# EAGLE board LCD-OLINUXINO-7TS (EAGLE 7.1.0)
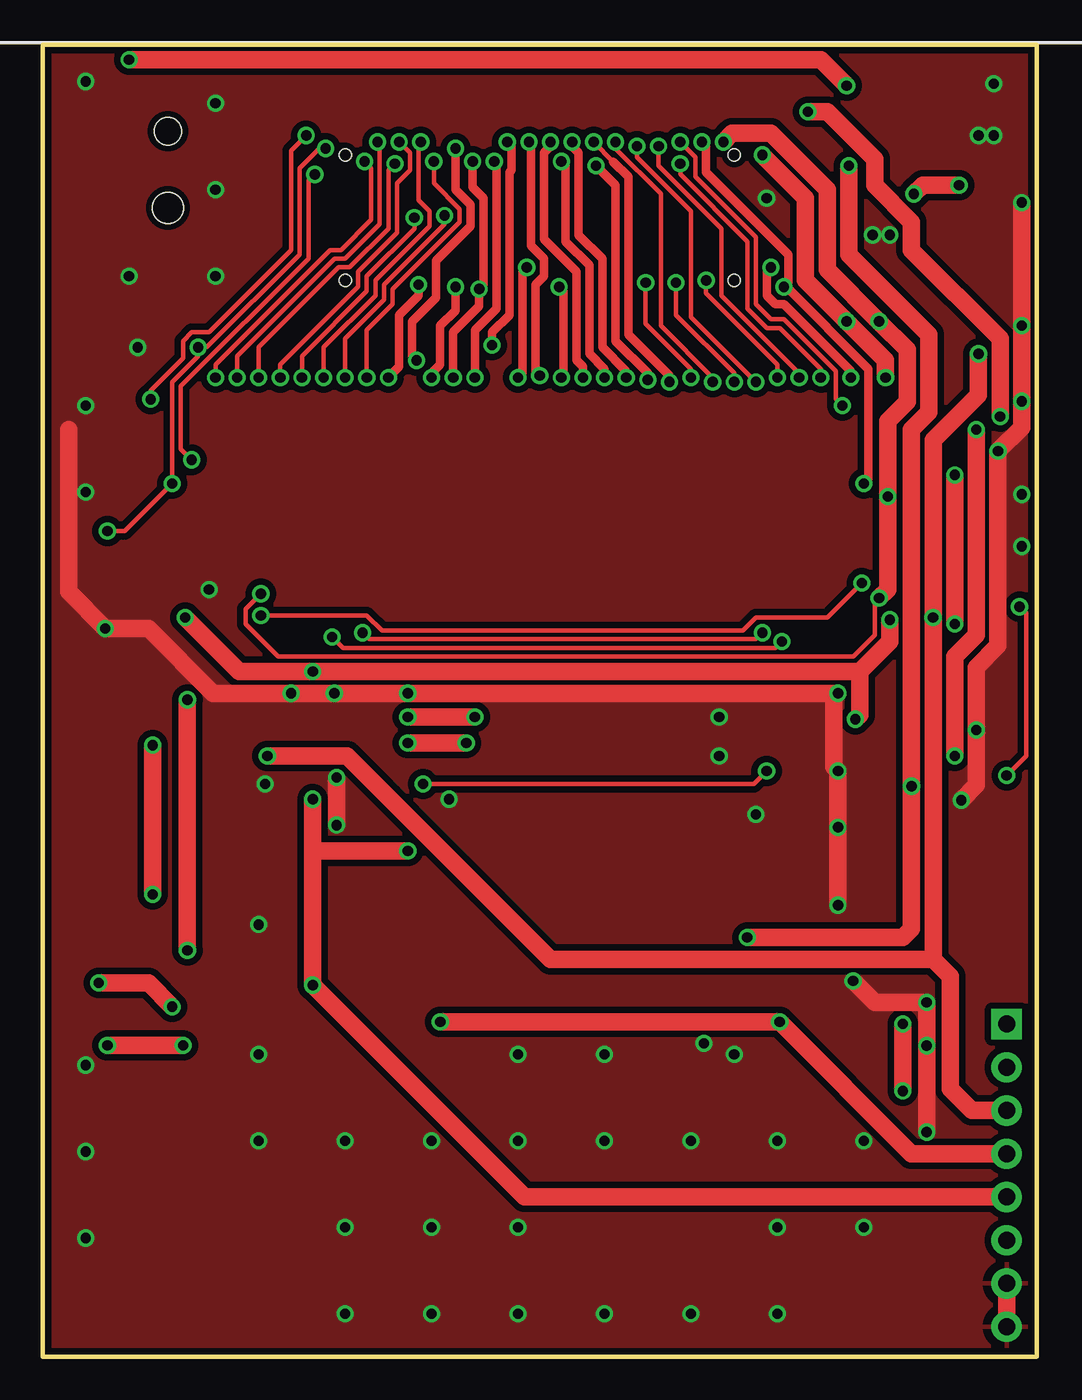
[diagram p0: board, top side]
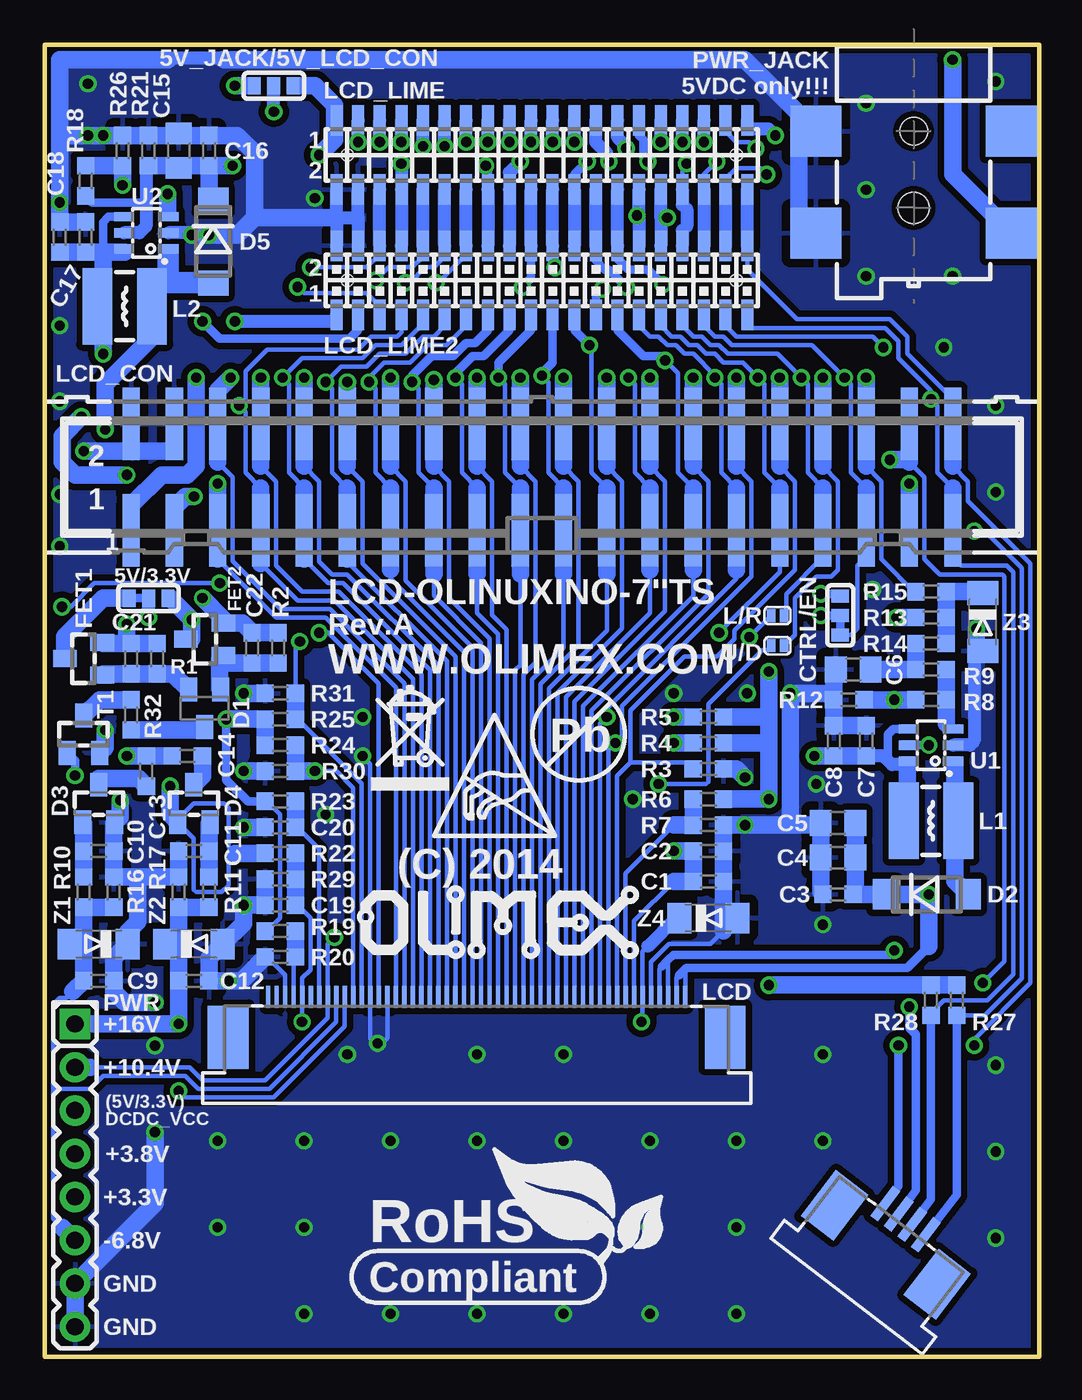
[diagram p1: board, bottom side, seen from below]

Size 58.42 x 77.09 mm. Coordinates in mm from the lower left corner, seen from the top.
Outline: 0,0 58.42,0 58.42,77.09 0,77.09 0,0
Copper layers (1+16): Top 0.035mm / dielectric 1.5mm / Bottom 0.035mm
Design rules "default": minimum track width 9.5mil, minimum drill 0.5mm, track to track 9.5mil, track to pad 9.5mil, pad to pad 9.5mil, via to via 9.5mil, smd to smd 1mil, copper to edge 10mil, drill to drill 8mil, minimum pad ring 8mil, minimum via ring 8mil, stop-mask expansion 4mil, vias tented up to drill 25mil, thermal gap 20mil
Net classes: 1 pwr: width 0.254 mm, drill 0.254 mm, clearance 0.241 mm

## Footprints (pad centres in the part's own frame; a part is rotated, then mirrored left to right if it is on the bottom)
SJ_2_SMALL = smd 0.762 x 1.016: 1 -1.143,0; 2 0,0; 3 1.143,0
C0603_DWS = smd 1.016 x 1.016: 1 -0.889,0; 2 0.889,0
C0805_5MIL_DWS = smd 1.27 x 1.524: 1 -1.016,0; 2 1.016,0
SJ_2_SMALL_23_TIED = smd 0.762 x 1.016: 1 -1.143,0; 2 0,0; 3 1.143,0
SOT23C = smd 1.4 x 1: 1 1.1,-0.95; 2 1.1,0.95; 3 -1.1,0
MLL-41 = smd 1.45 x 1.8: A 2.445,0; K -2.445,0
SOT23C(BAT54S) = smd 1.4 x 1: 1 1.1,-0.95; 2 1.1,0.95; 3 -1.1,0
SOT23 = smd 1.4 x 1: 1 1.1,-0.95; 2 1.1,0.95; 3 -1.1,0
CD42(43) = smd 1.75 x 4.5: 1 -1.6,0; 2 1.6,0
SJ_1_SMALLER = smd 0.508 x 0.762: 1 -0.381,0; 2 0.381,0
LCD7"_TOUCH(AT070TN90) = smd 0.25 x 1.3 bottom: 1 69.05,40.45; 2 69.55,40.45; 3 70.05,40.45; 4 70.55,40.45; 5 71.05,40.45; 6 71.55,40.45; 7 72.05,40.45; 8 72.55,40.45; 9 73.05,40.45; 10 73.55,40.45; 11 74.05,40.45; 12 74.55,40.45; 13 75.05,40.45; 14 75.55,40.45; 15 76.05,40.45; 16 76.55,40.45; 17 77.05,40.45; 18 77.55,40.45; 19 78.05,40.45; 20 78.55,40.45; 21 79.05,40.45; 22 79.55,40.45; 23 80.05,40.45; 24 80.55,40.45; 25 81.05,40.45; 26 81.55,40.45; 27 82.05,40.45; 28 82.55,40.45; 29 83.05,40.45; 30 83.55,40.45; 31 84.05,40.45; 32 84.55,40.45; 33 85.05,40.45; 34 85.55,40.45; 35 86.05,40.45; 36 86.55,40.45; 37 87.05,40.45; 38 87.55,40.45; 39 88.05,40.45; 40 88.55,40.45; 41 89.05,40.45; 42 89.55,40.45; 43 90.05,40.45; 44 90.55,40.45; 45 91.05,40.45; 46 91.55,40.45; 47 92.05,40.45; 48 92.55,40.45; 49 93.05,40.45; 50 93.55,40.45 | smd 0.55 x 2.2 rotated 217.5 bottom: 51 54.913,26.473; 52 55.707,27.082; 53 56.5,27.691; 54 57.294,28.299 | smd 2.4 x 3.7 bottom: P1 95.9,38.075; P2 66.7,38.075 | smd 2.4 x 3.4 rotated 217.5 bottom: P3 60.275,28.192; P4 54.245,23.566
ML40-MALE(GBH-254-SMT-40) = smd 1 x 4.25: 1 -24.13,-3.125; 2 -24.13,3.125; 3 -21.59,-3.125; 4 -21.59,3.125; 5 -19.05,-3.125; 6 -19.05,3.125; 7 -16.51,-3.125; 8 -16.51,3.125; 9 -13.97,-3.125; 10 -13.97,3.125; 11 -11.43,-3.125; 12 -11.43,3.125; 13 -8.89,-3.125; 14 -8.89,3.125; 15 -6.35,-3.125; 16 -6.35,3.125; 17 -3.81,-3.125; 18 -3.81,3.125; 19 -1.27,-3.125; 20 -1.27,3.125; 21 1.27,-3.125; 22 1.27,3.125; 23 3.81,-3.125; 24 3.81,3.125; 25 6.35,-3.125; 26 6.35,3.125; 27 8.89,-3.125; 28 8.89,3.125; 29 11.43,-3.125; 30 11.43,3.125; 31 13.97,-3.125; 32 13.97,3.125; 33 16.51,-3.125; 34 16.51,3.125; 35 19.05,-3.125; 36 19.05,3.125; 37 21.59,-3.125; 38 21.59,3.125; 39 24.13,-3.125; 40 24.13,3.125
YA-V36P-2X20-LF = smd 0.7 x 1.8: 1 -12.065,2.032; 2 -12.065,-2.032; 3 -10.795,2.032; 4 -10.795,-2.032; 5 -9.525,2.032; 6 -9.525,-2.032; 7 -8.255,2.032; 8 -8.255,-2.032; 9 -6.985,2.032; 10 -6.985,-2.032; 11 -5.715,2.032; 12 -5.715,-2.032; 13 -4.445,2.032; 14 -4.445,-2.032; 15 -3.175,2.032; 16 -3.175,-2.032; 17 -1.905,2.032; 18 -1.905,-2.032; 19 -0.635,2.032; 20 -0.635,-2.032; 21 0.635,2.032; 22 0.635,-2.032; 23 1.905,2.032; 24 1.905,-2.032; 25 3.175,2.032; 26 3.175,-2.032; 27 4.445,2.032; 28 4.445,-2.032; 29 5.715,2.032; 30 5.715,-2.032; 31 6.985,2.032; 32 6.985,-2.032; 33 8.255,2.032; 34 8.255,-2.032; 35 9.525,2.032; 36 9.525,-2.032; 37 10.795,2.032; 38 10.795,-2.032; 39 12.065,2.032; 40 12.065,-2.032 | hole 0.7: -11.43,0; 11.43,0
GPH127SMT-02X20(PA-V16X-2X20-LF) = smd 0.7 x 1.8: 1 -12.065,-2.032; 2 -12.065,2.032; 3 -10.795,-2.032; 4 -10.795,2.032; 5 -9.525,-2.032; 6 -9.525,2.032; 7 -8.255,-2.032; 8 -8.255,2.032; 9 -6.985,-2.032; 10 -6.985,2.032; 11 -5.715,-2.032; 12 -5.715,2.032; 13 -4.445,-2.032; 14 -4.445,2.032; 15 -3.175,-2.032; 16 -3.175,2.032; 17 -1.905,-2.032; 18 -1.905,2.032; 19 -0.635,-2.032; 20 -0.635,2.032; 21 0.635,-2.032; 22 0.635,2.032; 23 1.905,-2.032; 24 1.905,2.032; 25 3.175,-2.032; 26 3.175,2.032; 27 4.445,-2.032; 28 4.445,2.032; 29 5.715,-2.032; 30 5.715,2.032; 31 6.985,-2.032; 32 6.985,2.032; 33 8.255,-2.032; 34 8.255,2.032; 35 9.525,-2.032; 36 9.525,2.032; 37 10.795,-2.032; 38 10.795,2.032; 39 12.065,-2.032; 40 12.065,2.032 | hole 0.7: -11.43,0; 11.43,0
HN1X8 = drill 1 pad 1.778 square: 1 -8.89,0 | drill 1 pad 1.778: 2 -6.35,0; 3 -3.81,0; 4 -1.27,0; 5 1.27,0; 6 3.81,0; 7 6.35,0; 8 8.89,0
PWR-JACK-SMD = smd 3 x 3: 1 6,5.75; 2 0,-5.75; 3 6,-5.75; 4 0,5.75 | hole 1.6: 0,0 | hole 1.8: 4.5,0
R0603_5MIL_DWS = smd 1.016 x 1.016: 1 -0.889,0; 2 0.889,0
SOT-23 = smd 1.4 x 1: 1 1.1,-0.95; 2 1.1,0.95; 3 -1.1,0
SOT23-6 = smd 1.2 x 0.55: 1 1.3,-0.95; 2 1.3,0; 3 1.3,0.95; 4 -1.3,0.95; 5 -1.3,0; 6 -1.3,-0.95
MINI-MELF = smd 1.4 x 1.8: 1 -1.7,0; 2 1.7,0

## Placement (x,y rotation side)
5V/3.3V  5V:Close/3.3V:Open  [SJ_2_SMALL]  52.32,44.58 0 bottom
5V_JACK/5V_LCD_CON  5V_JACK:Open/5V_LCD_CON:Close  [SJ_2_SMALL]  44.96,74.68 0 bottom
C1  22uF/6.3V  [C0603_DWS]  19.43,27.94 0 bottom
C2  100nF  [C0603_DWS]  19.43,29.72 0 bottom
C3  100nF  [C0603_DWS]  11.81,27.18 180 bottom
C4  1uF/25V  [C0805_5MIL_DWS]  11.81,29.34 180 bottom
C5  1uF/25V  [C0805_5MIL_DWS]  11.81,31.37 180 bottom
C6  10uF/16V  [C0805_5MIL_DWS]  10.92,40.39 180 bottom
C7  22uF/6.3V  [C0603_DWS]  10.16,36.2 270 bottom
C8  22uF/6.3V  [C0603_DWS]  12.06,36.2 270 bottom
C9  100nF  [C0603_DWS]  55.24,22.1 0 bottom
C10  100nF  [C0603_DWS]  55.24,29.72 0 bottom
C11  100nF  [C0603_DWS]  49.66,29.72 180 bottom
C12  100nF  [C0603_DWS]  49.66,22.1 0 bottom
C13  100nF  [C0603_DWS]  52.45,34.42 90 bottom
C14  100nF  [C0603_DWS]  50.04,35.31 0 bottom
C15  10uF/16V  [C0805_5MIL_DWS]  50.55,70.87 90 bottom
C16  100nF  [C0603_DWS]  48.77,70.87 90 bottom
C17  22uF/6.3V  [C0603_DWS]  56.01,65.79 270 bottom
C18  22uF/6.3V  [C0603_DWS]  57.53,65.79 270 bottom
C19  100nF  [C0603_DWS]  44.58,26.54 180 bottom
C20  100nF  [C0603_DWS]  44.58,31.11 180 bottom
C21  22uF/6.3V  [C0603_DWS]  53.34,41.02 270 bottom
C22  100nF  [C0603_DWS]  46.23,41.66 270 bottom
CTRL/EN  CTRL:Close/EN:Open  [SJ_2_SMALL_23_TIED]  11.68,43.56 270 bottom
D1  BAT54C  [SOT23C]  49.02,38.1 90 bottom
D2  1N5819/SS14  [MLL-41]  6.6,27.18 0 bottom
D3  BAT54S  [SOT23C(BAT54S)]  55.24,32.51 270 bottom
D4  BAT54S  [SOT23C(BAT54S)]  49.66,32.51 270 bottom
D5  1N5819/SS14  [MLL-41]  48.51,65.53 270 bottom
FET1  IRLML6402  [SOT23]  56.13,41.02 0 bottom
FET2  IRLML6402  [SOT23]  49.02,42.16 0 bottom
L1  4.7uH/1.15A/DCR<0.1R/CD43  [CD42(43)]  6.35,31.5 0 bottom
L2  4.7uH/1.15A/DCR<0.1R/CD43  [CD42(43)]  53.72,61.72 0 bottom
L/R  Open  [SJ_1_SMALLER]  15.37,43.56 0 bottom
LCD  AT070TN90+(FPV-WZA21-50-LF)+(FPA-WZB25-04-LF)  [LCD7"_TOUCH(AT070TN90)]  -48.26,-19.29 0 top
LCD_CON  ML40-GBH-254-SMT-40  [ML40-MALE(GBH-254-SMT-40)]  29.21,51.69 0 bottom
LCD_LIME  GPH127SMT-02x20  [YA-V36P-2X20-LF]  29.21,70.61 0 bottom
LCD_LIME2  GPH127SMT-02x20  [GPH127SMT-02X20(PA-V16X-2X20-LF)]  29.21,63.25 0 bottom
PWR  NA(HN1X8)  [HN1X8]  56.64,10.67 270 bottom
PWR_JACK  DCJ-W54R-20-LF  [PWR-JACK-SMD]  7.37,72.01 270 bottom
R1  20k  [R0603_5MIL_DWS]  51.82,41.02 90 bottom
R2  20k  [R0603_5MIL_DWS]  44.7,41.66 90 bottom
R3  NA  [R0603_5MIL_DWS]  19.43,34.54 180 bottom
R4  NA  [R0603_5MIL_DWS]  19.43,36.07 180 bottom
R5  NA  [R0603_5MIL_DWS]  19.43,37.59 180 bottom
R6  NA  [R0603_5MIL_DWS]  19.43,32.77 180 bottom
R7  10k  [R0603_5MIL_DWS]  19.43,31.24 180 bottom
R8  2.2k  [R0603_5MIL_DWS]  6.35,38.61 180 bottom
R9  20k  [R0603_5MIL_DWS]  6.35,40.39 180 bottom
R10  1k/1%  [R0603_5MIL_DWS]  56.13,27.3 90 bottom
R11  1k/1%  [R0603_5MIL_DWS]  48.77,27.3 90 bottom
R12  2.2R  [R0603_5MIL_DWS]  11.18,38.61 180 bottom
R13  4.7k  [R0603_5MIL_DWS]  6.35,43.43 180 bottom
R14  4.7k  [R0603_5MIL_DWS]  6.35,41.91 180 bottom
R15  220R  [R0603_5MIL_DWS]  6.35,44.96 0 bottom
R16  51k/1%  [R0603_5MIL_DWS]  54.36,27.3 270 bottom
R17  51k/1%  [R0603_5MIL_DWS]  50.55,27.3 270 bottom
R18  51k/1%  [R0603_5MIL_DWS]  56.01,69.09 270 bottom
R19  10k  [R0603_5MIL_DWS]  44.58,25.02 0 bottom
R20  NA  [R0603_5MIL_DWS]  44.58,23.5 0 bottom
R21  20k  [R0603_5MIL_DWS]  52.32,70.87 270 bottom
R22  1k/1%  [R0603_5MIL_DWS]  44.58,29.59 0 bottom
R23  10k  [R0603_5MIL_DWS]  44.58,32.64 0 bottom
R24  NA  [R0603_5MIL_DWS]  44.58,35.94 0 bottom
R25  10k  [R0603_5MIL_DWS]  44.58,37.47 0 bottom
R26  1k/1%  [R0603_5MIL_DWS]  53.85,70.87 90 bottom
R27  NA  [R0603_5MIL_DWS]  4.83,20.95 270 bottom
R28  NA  [R0603_5MIL_DWS]  6.35,20.95 270 bottom
R29  560R/1%  [R0603_5MIL_DWS]  44.58,28.07 180 bottom
R30  10k  [R0603_5MIL_DWS]  44.58,34.42 180 bottom
R31  NA  [R0603_5MIL_DWS]  44.58,38.99 180 bottom
R32  1k/1%  [R0603_5MIL_DWS]  53.34,37.72 270 bottom
T1  DTC114YKA  [SOT-23]  56.13,36.58 270 bottom
U1  AP3031KTR-G1  [SOT23-6]  6.35,35.94 0 bottom
U2  AP3031KTR-G1  [SOT23-6]  52.45,66.04 0 bottom
U$8  [OLIMEX1_V]  22.35,23.26 0 bottom
U$9  [PB]  27.05,36.58 0 bottom
U$10  [ESD_SYMBOL]  35.56,30.61 0 bottom
U$11  [RECYCLE_BIN1/8]  39.24,33.27 0 bottom
U$12  [ROHS]  39.37,3.81 0 bottom
U/D  Open  [SJ_1_SMALLER]  15.37,41.78 0 bottom
Z1  BZV55C6V8  [MINI-MELF]  55.24,24.26 180 bottom
Z2  BZV55C16  [MINI-MELF]  49.66,24.26 0 bottom
Z3  NA(BZV55C3V0)  [MINI-MELF]  3.3,43.18 270 bottom
Z4  NA(BZV55C3V9)  [MINI-MELF]  19.43,25.78 0 bottom

## Library data of the parts
5V/3.3V 5V_JACK/5V_LCD_CON CTRL/EN L/R U/D = jumper
C1-C22 R1-R32 = rcl
D1 D3 D4 = semicon-smd-ipc
D2 D5 PWR_JACK Z1-Z4 = gogo
FET1 FET2 PWR = Penko
L1 L2 T1 = OLIMEX_DISCRET
LCD = olimex_lcd
LCD_CON LCD_LIME LCD_LIME2 = con-harting-ml
U1 U2 = OLIMEX_IC
U$8-U$12 = olimex_logo1

## Nets
+5V: 5V/3.3V.2 C7.2 C8.2 C17.2 C18.2 L1.1 L2.1 PWR.3 U1.4 U1.6 U2.4 U2.6
+12V: C15.1 C16.1 D4.1 D5.K LCD.43 PWR.2 R18.2 R21.2 R22.1 U2.5
+15V: C12.1 LCD.41 PWR.1 R11.1 R17.2 Z2.1
-24V: C9.1 LCD.42 PWR.6 R10.1 R16.2 Z1.2
GND [pwr]: C1.2 C2.2 C3.2 C4.2 C5.2 C6.2 C7.1 C8.1 C9.2 C10.2 C11.2 C12.2 C15.2 C16.2 C17.1 C18.1 C19.2 C20.2 D3.2 LCD.5 LCD.36 LCD.38 LCD.48 LCD_CON.2 LCD_CON.4 LCD_LIME2.2 LCD_LIME2.4 LCD_LIME.2 LCD_LIME.4 PWR.7 PWR.8 PWR_JACK.2 PWR_JACK.3 R3.1 R7.1 R12.2 R16.1 R17.1 R20.1 R21.1 R26.2 R29.2 R30.2 R31.2 T1.2 U1.2 U2.2 Z1.1 Z2.2 Z3.2 Z4.2
LCD_B0: LCD.19 LCD_CON.21 LCD_LIME2.21 LCD_LIME.21
LCD_B1: LCD.18 LCD_CON.22 LCD_LIME2.22 LCD_LIME.22
LCD_B2: LCD.17 LCD_CON.23 LCD_LIME2.23 LCD_LIME.23
LCD_B3: LCD.16 LCD_CON.24 LCD_LIME2.24 LCD_LIME.24
LCD_B4: LCD.15 LCD_CON.25 LCD_LIME2.25 LCD_LIME.25
LCD_B5: LCD.14 LCD_CON.26 LCD_LIME2.26 LCD_LIME.26
LCD_B6: LCD.13 LCD_CON.27 LCD_LIME2.27 LCD_LIME.27
LCD_B7: LCD.12 LCD_CON.28 LCD_LIME2.28 LCD_LIME.28
LCD_BKL: LCD_CON.36 LCD_LIME2.36 LCD_LIME.36 R15.1
LCD_CLK: LCD.37 LCD_CON.31 LCD_LIME2.31 LCD_LIME.31
LCD_DE: LCD.9 LCD_CON.32 LCD_LIME2.32 LCD_LIME.32 R3.2
LCD_G0: LCD.27 LCD_CON.13 LCD_LIME2.13 LCD_LIME.13
LCD_G1: LCD.26 LCD_CON.14 LCD_LIME2.14 LCD_LIME.14
LCD_G2: LCD.25 LCD_CON.15 LCD_LIME2.15 LCD_LIME.15
LCD_G3: LCD.24 LCD_CON.16 LCD_LIME2.16 LCD_LIME.16
LCD_G4: LCD.23 LCD_CON.17 LCD_LIME2.17 LCD_LIME.17
LCD_G5: LCD.22 LCD_CON.18 LCD_LIME2.18 LCD_LIME.18
LCD_G6: LCD.21 LCD_CON.19 LCD_LIME2.19 LCD_LIME.19
LCD_G7: LCD.20 LCD_CON.20 LCD_LIME2.20 LCD_LIME.20
LCD_HSYNC: LCD.11 LCD_CON.29 LCD_LIME2.29 LCD_LIME.29 R5.2
LCD_L/R: L/R.1 LCD.39 R25.2 R31.1
LCD_PWRE: CTRL/EN.3 LCD_CON.35 LCD_LIME2.35 LCD_LIME.35
LCD_R0: LCD.35 LCD_CON.5 LCD_LIME2.5 LCD_LIME.5
LCD_R1: LCD.34 LCD_CON.6 LCD_LIME2.6 LCD_LIME.6
LCD_R2: LCD.33 LCD_CON.7 LCD_LIME2.7 LCD_LIME.7
LCD_R3: LCD.32 LCD_CON.8 LCD_LIME2.8 LCD_LIME.8
LCD_R4: LCD.31 LCD_CON.9 LCD_LIME2.9 LCD_LIME.9
LCD_R5: LCD.30 LCD_CON.10 LCD_LIME2.10 LCD_LIME.10
LCD_R6: LCD.29 LCD_CON.11 LCD_LIME2.11 LCD_LIME.11
LCD_R7: LCD.28 LCD_CON.12 LCD_LIME2.12 LCD_LIME.12
LCD_U/D: LCD.40 R24.2 R30.1 U/D.1
LCD_VSYNC: LCD.10 LCD_CON.30 LCD_LIME2.30 LCD_LIME.30 R4.2
N$1: LCD.8 R6.2 R7.2
N$2: C14.2 D4.3
N$3 [pwr]: C22.1 CTRL/EN.1 FET2.2 LCD_CON.3 LCD_LIME2.3 LCD_LIME.3 R2.2
N$4: C11.1 D4.2 R11.2
N$5: R8.1 R9.1 U1.3
N$6: C10.1 D3.1 R10.2
N$7: 5V_JACK/5V_LCD_CON.2 C21.1 FET1.2 R1.2
N$8: C22.2 D1.1 FET2.1 R2.1
N$9: C21.2 D1.2 FET1.1 R1.1
N$10: C13.1 D3.3
N$11: R32.1 T1.3
N$12: C6.1 R9.2 R14.2
N$13: D2.A L1.2 U1.1
N$14: R13.1 R14.1 R15.2 Z3.1
N$15: L/R.2 LCD_CON.33 LCD_LIME2.33 LCD_LIME.33
N$16: CTRL/EN.2 T1.1
N$17: LCD_CON.34 LCD_LIME2.34 LCD_LIME.34 U/D.2
N$18: 5V/3.3V.1 FET1.3
N$19: D1.3 R32.2
N$22: 5V_JACK/5V_LCD_CON.1 PWR_JACK.1
N$23: 5V_JACK/5V_LCD_CON.3 LCD_CON.1 LCD_LIME2.1 LCD_LIME.1
N$42: LCD.47 R19.2 R20.2
N$123: C13.2 C14.1 D5.A L2.2 U2.1
N$126: R18.1 R26.1 U2.3
RESET: C20.1 LCD.44 R23.2
TPX1: LCD.51 LCD_CON.37 LCD_LIME2.37 LCD_LIME.37 R27.2
TPX2: LCD.53 LCD_CON.38 LCD_LIME2.38 LCD_LIME.38
TPY1: LCD.52 LCD_CON.39 LCD_LIME2.39 LCD_LIME.39 R28.2
TPY2: LCD.54 LCD_CON.40 LCD_LIME2.40 LCD_LIME.40
VCC [pwr]: 5V/3.3V.3 C1.1 C2.1 FET2.3 LCD.7 PWR.5 R4.1 R5.1 R6.1 R13.2 R19.1 R23.1 R24.1 R25.1 R27.1 R28.1
VCOM: C19.1 LCD.6 LCD.46 PWR.4 R22.2 R29.1 Z4.1
VLED+: C3.1 C4.1 C5.1 D2.K LCD.1 LCD.2 U1.5
VLED-: LCD.3 LCD.4 R8.2 R12.1

## Tracks (layer width: path | path; a pad name or v marks a point on that pad's centre or on a via)
+5V  (via drill 0.6)
  Top 1.016: v13.21,35.31 17.91,35.31 29.84,23.37 52.32,23.37 | 52.32,23.37 53.34,22.35 53.34,15.75 54.61,14.48 PWR.3 | 52.32,23.37 v52.32,43.43 52.32,53.85 54.99,56.52 v54.99,58.93
  Bottom 0.508: 53.72,64.9 53.72,65.09 U2.6 | U2.4 54.68,66.99 54.99,66.67 54.99,64.9 | U1.4 8.57,36.89 8.89,36.58 8.89,35.43 9.02,35.31 | 5V/3.3V.2 53.34,44.58 | 7.75,34.8 7.75,34.99 U1.6
  Bottom 0.762: C7.2 9.02,35.31 9.02,35.18 8.64,34.8 7.75,34.8 7.75,34.67 | v52.32,43.43 5V/3.3V.2
  Bottom 1.016: C18.2 C17.2 54.99,64.9 | 54.99,64.9 53.72,64.9 | L1.1 7.75,31.5 7.75,34.67 | C7.2 C8.2 v13.21,35.31 | 54.99,61.72 54.99,64.9 | v54.99,58.93 54.99,61.72 | 54.99,61.72 L2.1
+12V  (via drill 0.6)
  Top 1.016: v47.37,69.98 47.37,64.77 52.07,60.07 52.07,55.5 51.05,54.48 v51.05,33.53 51.05,25.15 50.55,24.64 v41.4,24.64
  Bottom 0.254: 55.75,17.02 49.91,17.02 49.15,16.26 45.47,16.26 41.79,19.93 LCD.43 41.79,24.25 v41.4,24.64 | 47.62,27.7 47.62,29.21 47.24,29.59 47.62,29.97 47.62,32.26 47.88,32.51 49.66,32.51 50.61,31.56 D4.1 49.66,30.46 49.66,27.43 49.53,27.31 48.01,27.31 47.62,27.7
  Bottom 0.508: 52.47,67.82 55.63,67.82 R18.2
  Bottom 0.762: U2.5 52.85,66.04 52.47,66.42 52.47,67.82 52.47,69.98 R21.2
  Bottom 1.016: 50.55,69.98 R21.2 | 50.55,69.98 C15.1 | C16.1 50.55,69.98 | C16.1 48.77,68.23 D5.K | D4.1 51.05,31.86 v51.05,33.53 | 47.24,29.59 R22.1 | 55.75,17.02 PWR.2 | v47.37,69.98 C16.1
+15V  (via drill 0.6)
  Top 1.016: v50.55,15.62 v50.55,19.56
  Bottom 0.254: v50.55,15.62 50.16,15.24 44.96,15.24 40.79,19.41 LCD.41
  Bottom 1.016: R11.1 R17.2 50.55,24.26 | 50.55,24.26 C12.1 v50.55,19.56 PWR.1 | 50.55,24.26 Z2.1
-24V
  Bottom 0.254: 56.77,21.46 57.15,21.08 57.53,21.08 57.91,20.7 57.91,15.75 | 57.4,7.62 57.91,8.13 57.91,15.75 | 57.91,15.75 55.75,15.75 54.99,16.51 50.16,16.51 49.4,15.75 45.21,15.75 41.29,19.67 LCD.42
  Bottom 1.016: R16.2 R10.1 56.13,24.26 | 56.13,24.26 Z1.2 | 56.13,24.26 C9.1 56.77,21.46 | 57.4,7.62 PWR.6
GND  (via drill 0.6, 0.6 pad 1.02)
  Top 1.016: v46.74,26.54 v46.74,31.11 v46.74,34.42 46.48,34.67 46.48,38.99 | v53.98,32.7 54.86,33.59 v54.86,36.83 54.86,40.51 56.13,41.78 v56.13,53.21 57.53,54.61 v57.53,67.82 | 46.48,38.99 v21.46,38.99 v17.14,38.99 v14.61,38.99 10.03,38.99 6.22,42.8 v3.68,42.8 1.52,44.96 1.52,54.48 | 46.48,38.99 v46.74,38.99 | v17.27,31.24 v17.27,34.04 | v47.62,22.1 48.9,20.83 v51.94,20.83 v51.94,13.21 | PWR.7 PWR.8
  Bottom 0.254: LCD.48 44.29,22.45 45.34,23.5 R20.1 | v39.75,35.31 39.29,34.84 LCD.38 39.29,18.72 38.99,18.41 v38.86,18.41 38.61,18.41 38.29,18.73 LCD.36 | LCD.5 22.79,23.2 21.73,24.26 19.32,24.26 18.54,25.03
  Bottom 0.762: v49.78,65.91 49.91,66.04 U2.2 | U1.2 4.06,35.94 3.81,36.2 3.81,41.35 3.68,41.48 | 41.27,66.93 LCD_LIME2.2 | 41.27,66.93 LCD_LIME.2 | 40.01,66.93 LCD_LIME2.4 | 40.01,66.93 LCD_LIME.4 | 41.27,66.93 40.01,66.93 | 51.18,76.2 51.05,76.33 48.01,76.33 47.88,76.2
  Bottom 1.016: v49.78,65.91 v48.77,65.91 47.12,65.91 46.1,66.93 | C17.1 C18.1 v57.53,67.82 57.53,71.75 | 50.55,71.75 R21.1 R26.2 v54.99,71.75 57.53,71.75 | 50.55,71.75 C15.2 | 50.55,71.75 C16.2 47.12,71.75 46.1,70.74 46.1,66.93 | C11.2 R17.1 52.96,28.19 | 52.96,28.19 52.96,25.54 53.55,24.96 Z1.1 54.36,23.45 C9.2 54.36,21.46 53.72,20.83 v51.94,20.83 | 52.96,28.19 R16.1 C10.2 54.36,31.35 D3.2 53.98,31.73 v53.98,32.7 | R29.2 C19.2 v46.74,26.54 46.74,25.48 Z2.2 48.77,23.45 C12.2 v47.62,22.1 46.86,22.1 R20.1 | v46.74,31.11 C20.2 | v46.74,34.42 R30.2 | v46.74,38.99 R31.2 | C3.2 12.83,27.3 C4.2 12.83,31.24 | 12.83,31.24 C5.2 | C7.1 C8.1 R12.2 12.06,38.99 | 12.06,38.99 12.06,40.26 C6.2 | 12.06,38.99 v14.61,38.99 14.61,31.24 | 18.54,25.78 C1.2 C2.2 R7.1 v17.27,31.24 14.61,31.24 | 18.54,25.78 18.54,25.03 | v17.27,34.04 17.78,34.54 R3.1 | 12.83,31.24 14.61,31.24 | 18.54,25.78 Z4.2 | 46.1,66.93 41.27,66.93 | LCD_CON.4 50.8,53.21 53.34,53.21 | Z3.2 3.68,41.48 v3.68,42.8 | T1.2 54.86,35.8 v54.86,36.83 | PWR.8 PWR.7 51.94,9.02 v51.94,13.21 | 53.34,53.21 LCD_CON.2 | v56.13,53.21 53.34,53.21 | PWR_JACK.3 14.1,66.01 14.1,72.01 | 47.88,76.2 17.27,76.2 14.1,73.03 14.1,72.01 | 51.18,76.2 57.53,76.2 57.53,71.75 | 14.1,72.01 PWR_JACK.2
  other vias: 23.88,32.77 9.78,45.09 41.91,31.88 42.55,68.07 17.78,2.54 17.78,7.62 17.78,12.7 12.7,12.7 12.7,17.78 22.86,12.7 22.86,7.62 22.86,2.54 27.94,2.54 33.02,2.54 38.1,2.54 43.18,2.54 43.18,7.62 48.26,7.62 43.18,12.7 48.26,12.7 38.1,12.7 33.02,12.7 27.94,12.7 27.94,7.62 27.94,17.78 33.02,17.78 40.64,17.78 2.54,6.99 2.54,12.06 2.54,17.14 12.7,25.4 13.08,33.66 39.75,37.59 57.53,47.62 57.53,50.67 2.54,50.8 2.54,55.88 55.88,74.8 55.88,71.75 57.53,56.13 57.53,60.58 51.94,18.29 5.59,59.31 5.08,63.5 10.16,63.5 10.16,68.58 10.16,73.66 2.54,74.93
  pour Top (isolate 0.381, rank 2): -2.54,77.98 -2.54,-2.54 60.96,-2.54 60.96,77.98
  pour Bottom (isolate 0.381, rank 3): -5.08,-5.08 63.5,-5.08 63.5,80.52 -5.08,80.52
LCD_B0  (via drill 0.6)
  Top 0.508: v28.57,71.37 28.7,71.25 28.7,65.28 29.46,64.52 29.46,63.5 28.96,62.99 28.96,57.91 v29.21,57.66
  Bottom 0.254: LCD.19 29.79,39.81 27.94,41.66 27.94,45.99 | 27.94,51.05 28.83,51.94 28.83,57.28 v29.21,57.66
  Bottom 0.508: LCD_LIME2.21 28.57,58.42 29.21,57.78 v29.21,57.66
  Bottom 0.762: v28.57,71.37 LCD_LIME.21
  Bottom 1.016: 27.94,45.99 LCD_CON.21 27.94,51.05
LCD_B1  (via drill 0.6)
  Top 0.508: v28.45,64.01 28.19,63.75 28.19,57.78 v27.94,57.53
  Bottom 0.254: LCD.18 29.29,39.54 27.05,41.78 27.05,51.44 27.94,52.32
  Bottom 0.508: LCD_LIME2.22 28.57,64.14 v28.45,64.01
  Bottom 0.762: LCD_LIME2.22 LCD_LIME.22
  Bottom 1.016: 27.94,52.32 LCD_CON.22 v27.94,57.53
LCD_B2  (via drill 0.6)
  Top 0.508: v27.3,71.37 27.56,71.12 27.56,69.72 27.43,69.6 27.43,61.21 26.42,60.2 v26.42,59.44
  Bottom 0.254: LCD.17 28.79,39.28 25.4,42.67 25.4,45.99 | 25.4,51.05 26.29,51.94 26.29,59.31 v26.42,59.44
  Bottom 0.508: LCD_LIME2.23 27.3,60.33 v26.42,59.44
  Bottom 0.762: v27.3,71.37 LCD_LIME.23
  Bottom 1.016: 25.4,45.99 LCD_CON.23 25.4,51.05
LCD_B3  (via drill 0.6)
  Top 0.508: v26.54,70.23 26.67,70.1 26.67,61.59 25.4,60.33 v25.4,57.53
  Bottom 0.254: LCD.16 28.29,39.02 24.51,42.8 24.51,51.44 25.4,52.32
  Bottom 0.508: LCD_LIME.24 27.3,69.47 v26.54,70.23
  Bottom 0.762: LCD_LIME.24 LCD_LIME2.24
  Bottom 1.016: 25.4,52.32 LCD_CON.24 v25.4,57.53
LCD_B4  (via drill 0.6)
  Top 0.508: v25.27,70.23 25.27,68.71 25.91,68.07 25.91,62.99 v25.65,62.74 25.65,61.72 24.13,60.2 v24.13,57.53
  Bottom 0.254: LCD.15 27.79,38.76 22.86,43.69 22.86,46.23 | 22.86,51.05 23.75,51.94 23.75,57.15 v24.13,57.53
  Bottom 0.508: LCD_LIME2.25 26.04,62.36 v25.65,62.74
  Bottom 0.762: v25.27,70.23 25.4,70.36 25.4,70.74 26.04,71.37 LCD_LIME.25
  Bottom 1.016: 22.86,46.23 LCD_CON.25 22.86,51.05
LCD_B5  (via drill 0.6)
  Top 0.508: v24.26,62.87 24.26,61.47 23.37,60.58 23.37,58.29 22.86,57.78 v22.86,57.53
  Bottom 0.254: LCD.14 27.29,38.5 21.97,43.81 21.97,51.44 22.86,52.32
  Bottom 0.508: LCD_LIME2.26 26.04,64.39 25.53,63.88 25.27,63.88 v24.26,62.87
  Bottom 0.762: LCD_LIME2.26 LCD_LIME.26
  Bottom 1.016: 22.86,52.32 LCD_CON.26 v22.86,57.53
LCD_B6  (via drill 0.6)
  Top 0.508: v24.26,70.99 24.26,68.58 25.15,67.69 25.15,66.42 23.11,64.39 23.11,62.23 21.72,60.83 21.72,58.8 v21.97,58.55
  Bottom 0.254: LCD.13 26.79,38.23 20.32,44.7 20.32,46.23 | 20.32,51.05 21.21,51.94 21.21,57.78 v21.97,58.55
  Bottom 0.508: LCD_LIME2.27 24.77,60.33 23.24,58.8 22.23,58.8 v21.97,58.55
  Bottom 0.762: v24.26,70.99 24.26,71.12 24.77,71.63 LCD_LIME.27
  Bottom 1.016: 20.32,46.23 LCD_CON.27 20.32,51.05
LCD_B7  (via drill 0.6)
  Top 0.508: v22.1,62.99 22.1,62.36 20.95,61.21 20.95,58.17 v20.32,57.53
  Bottom 0.254: LCD.12 26.29,37.97 19.43,44.83 19.43,51.44 20.32,52.32
  Bottom 0.508: LCD_LIME2.28 24.77,64.52 24.13,63.88 22.99,63.88 v22.1,62.99
  Bottom 0.762: LCD_LIME2.28 LCD_LIME.28
  Bottom 1.016: 20.32,52.32 LCD_CON.28 v20.32,57.53
LCD_BKL  (via drill 0.6)
  Top 0.254: v10.16,57.53 10.16,58.29 16.89,65.02 17.53,65.02 19.3,66.8 19.3,69.85 v18.92,70.23
  Bottom 0.254: R15.1 7.24,44.83 9.27,46.86 9.27,51.44 10.16,52.32 | LCD_LIME.36 19.68,69.47 v18.92,70.23
  Bottom 0.762: LCD_LIME.36 LCD_LIME2.36
  Bottom 1.016: 10.16,52.32 LCD_CON.36 v10.16,57.53
LCD_CLK  (via drill 0.6)
  Top 0.254: v22.23,71.37 22.1,71.25 22.1,67.94 22.73,67.31 22.73,66.42 19.56,63.25 19.56,62.36 16.51,59.31 v16.51,57.53 | v42.29,42.55 41.91,42.16 19.18,42.16 v18.8,42.55
  Bottom 0.254: LCD.37 38.79,39.55 41.78,42.55 v42.29,42.55 | 15.24,51.05 16.13,51.94 16.13,57.15 v16.51,57.53 17.4,58.42 18.54,58.42 19.05,58.93 19.56,58.93 20.07,59.44 20.57,59.44 21.08,59.94 21.59,59.94 22.23,60.58 LCD_LIME2.31 | v18.8,42.55 15.24,46.1 LCD_CON.31
  Bottom 0.762: v22.23,71.37 LCD_LIME.31
  Bottom 1.016: LCD_CON.31 15.24,51.05
LCD_DE  (via drill 0.6)
  Top 0.254: v21.84,66.93 21.84,66.29 19.05,63.5 19.05,62.61 15.24,58.8 v15.24,57.53
  Bottom 0.254: LCD.9 24.79,34.14 24,34.92 | 24,34.92 24,37.97 20.83,41.15 18.92,41.15 17.91,42.16 17.91,42.67 14.35,46.23 14.35,51.44 15.24,52.32 | 24,34.92 20.7,34.92 R3.2
  Bottom 0.762: 22.23,66.93 LCD_LIME2.32 | 22.23,66.93 LCD_LIME.32 | v21.84,66.93 22.23,66.93
  Bottom 1.016: 15.24,52.32 LCD_CON.32 v15.24,57.53
LCD_G0  (via drill 0.6)
  Top 0.254: v33.66,71.37 33.66,70.99 36.32,68.33 36.32,60.58 39.37,57.53 v39.37,57.28
  Bottom 0.254: LCD.27 33.79,41.41 38.1,45.72 38.1,46.24 | LCD_LIME2.13 33.66,60.58 34.8,59.44 35.94,59.44 36.96,58.42 38.48,58.42 39.37,57.53 v39.37,57.28 38.99,56.9 38.99,51.94 38.1,51.05
  Bottom 0.762: v33.66,71.37 LCD_LIME.13
  Bottom 1.016: 38.1,46.24 LCD_CON.13 38.1,51.05
LCD_G1  (via drill 0.6)
  Top 0.254: v35.43,63.12 35.43,60.71 38.1,58.04 v38.1,57.53
  Bottom 0.254: LCD.26 33.29,41.69 37.21,45.61 37.21,51.44 38.1,52.32 | LCD_LIME2.14 33.66,64.77 35.31,63.12 v35.43,63.12
  Bottom 0.762: LCD_LIME2.14 LCD_LIME.14
  Bottom 1.016: 38.1,52.32 LCD_CON.14 v38.1,57.53
LCD_G2  (via drill 0.6)
  Top 0.254: 33.53,70.23 v32.38,71.37
  Top 0.508: 33.53,70.23 34.42,69.34 34.42,60.07 36.83,57.66 v36.83,57.28
  Bottom 0.254: LCD.25 32.79,41.95 35.56,44.72 35.56,45.99 | 35.56,51.05 36.45,51.94 36.45,56.9 v36.83,57.28
  Bottom 0.508: v36.83,57.28 36.83,57.66 35.69,58.8 34.42,58.8 33.66,59.56 33.15,59.56 32.38,60.33 LCD_LIME2.15
  Bottom 0.762: v32.38,71.37 LCD_LIME.15
  Bottom 1.016: 35.56,45.99 LCD_CON.15 35.56,51.05
LCD_G3  (via drill 0.6)
  Top 0.508: v32.51,69.98 33.66,68.83 33.66,59.69 35.56,57.78 v35.56,57.4
  Bottom 0.254: LCD.24 32.29,42.21 34.67,44.59 34.67,51.44 35.56,52.32
  Bottom 0.508: LCD_LIME.16 32.38,69.85 v32.51,69.98
  Bottom 0.762: LCD_LIME.16 LCD_LIME2.16
  Bottom 1.016: 35.56,52.32 LCD_CON.16 v35.56,57.4
LCD_G4  (via drill 0.6)
  Top 0.508: v31.11,71.37 31.11,71.12 31.5,70.74 31.5,65.91 32.89,64.52 32.89,59.31 34.29,57.91 v34.29,57.53
  Bottom 0.254: LCD.23 31.79,42.47 33.02,43.7 33.02,45.99 | 33.02,51.05 33.91,51.94 33.91,57.15 v34.29,57.53
  Bottom 0.508: LCD_LIME2.17 31.11,60.33 32.64,58.8 33.27,58.8 34.29,57.78 v34.29,57.53
  Bottom 0.762: v31.11,71.37 LCD_LIME.17
  Bottom 1.016: 33.02,45.99 LCD_CON.17 33.02,51.05
LCD_G5  (via drill 0.6)
  Top 0.508: v33.02,57.53 33.02,58.04 32.13,58.93 32.13,64.14 30.73,65.53 30.73,69.98 v30.48,70.23
  Bottom 0.254: LCD.22 31.29,42.73 32.13,43.58 32.13,51.44 33.02,52.32
  Bottom 0.762: LCD_LIME2.18 LCD_LIME.18 31.11,69.6 v30.48,70.23
  Bottom 1.016: 33.02,52.32 LCD_CON.18 v33.02,57.53
LCD_G6  (via drill 0.6)
  Top 0.508: v29.84,71.37 29.84,71.12 29.46,70.74 29.46,65.66 31.37,63.75 31.37,58.55 31.75,58.17 v31.75,57.53
  Bottom 0.254: LCD.21 30.79,40.34 30.48,40.66 30.48,45.99 | 30.48,51.05 31.37,51.94 31.37,57.15 v31.75,57.53
  Bottom 0.508: v31.75,57.53 31.75,58.42 29.84,60.33 LCD_LIME2.19
  Bottom 0.762: v29.84,71.37 LCD_LIME.19
  Bottom 1.016: 30.48,45.99 LCD_CON.19 30.48,51.05
LCD_G7  (via drill 0.6)
  Top 0.508: v30.35,62.87 30.61,62.61 30.61,57.66 v30.48,57.53
  Bottom 0.254: LCD.20 30.29,40.08 29.59,40.78 29.59,51.44 30.48,52.32
  Bottom 0.508: LCD_LIME2.20 29.84,63.37 v30.35,62.87
  Bottom 0.762: LCD_LIME2.20 LCD_LIME.20
  Bottom 1.016: 30.48,52.32 LCD_CON.20 v30.48,57.53
LCD_HSYNC  (via drill 0.6)
  Top 0.254: v22.99,70.23 22.99,68.96 24.51,67.44 24.51,66.67 20.57,62.74 20.57,61.85 19.05,60.33 v19.05,57.53
  Top 1.016: v25.4,37.59 v21.46,37.59
  Bottom 0.254: LCD.11 25.79,37.2 v25.4,37.59 25.4,38.1 17.78,45.72 17.78,46.23 | 17.78,51.05 18.67,51.94 18.67,57.15 v19.05,57.53 19.05,57.66 20.32,58.93 20.83,58.93 21.34,59.44 21.84,59.44 22.35,59.94 22.86,59.94 23.5,60.58 LCD_LIME2.29
  Bottom 0.508: v22.99,70.23 23.24,70.48 23.24,71.5 23.5,71.75 LCD_LIME.29
  Bottom 1.016: 17.78,46.23 LCD_CON.29 17.78,51.05 | v21.46,37.59 R5.2
LCD_L/R  (via drill 0.6)
  Top 0.254: v17.02,42.29 17.65,41.66 43.05,41.66 v43.43,42.04
  Bottom 0.254: LCD.39 39.79,33.69 43.56,37.47 R25.2 R31.1 43.69,41.78 v43.43,42.04 | v17.02,42.29 L/R.1
  Bottom 1.016: R31.1 R25.2
LCD_PWRE  (via drill 0.6)
  Top 0.254: v11.43,57.53 11.43,58.8 17.14,64.52 17.78,64.52 19.81,66.55 19.81,71.25 v19.68,71.37
  Bottom 0.254: 10.16,51.05 11.05,51.94 11.05,57.15 v11.43,57.53 13.34,59.44 18.03,59.44 18.54,59.94 19.05,59.94 19.68,60.58 LCD_LIME2.35 | LCD_CON.35 10.16,46.99 10.67,46.48 10.67,42.8 11.05,42.42 CTRL/EN.3
  Bottom 0.762: v19.68,71.37 LCD_LIME.35
  Bottom 1.016: LCD_CON.35 10.16,51.05
LCD_R0  (via drill 0.6)
  Top 0.508: v38.73,71.37 38.99,71.12 38.99,69.6 43.81,64.77 43.81,63.12 v43.56,62.87 43.69,62.87 48.51,58.04 48.51,51.56 v48.26,51.31
  Bottom 0.254: LCD.35 37.79,39.31 41.91,43.43 44.83,43.43 48.26,46.86 | LCD_LIME2.5 38.73,61.72 39.5,62.48 43.18,62.48 v43.56,62.87
  Bottom 0.762: v38.73,71.37 LCD_LIME.5
  Bottom 1.016: 48.26,46.86 LCD_CON.5 v48.26,51.31
LCD_R1  (via drill 0.6)
  Top 0.508: v42.8,64.01 42.55,63.75 42.55,62.36 43.05,61.85 43.56,61.85 47.5,57.91 v47.5,57.53
  Bottom 0.254: 48.26,52.58 47.37,51.69 47.37,46.75 44.56,43.94 41.66,43.94 37.29,39.58 LCD.34 | LCD_LIME2.6 38.73,64.77 39.5,64.01 v42.8,64.01
  Bottom 0.762: LCD_LIME2.6 LCD_LIME.6
  Bottom 1.016: 48.26,52.58 LCD_CON.6 48.26,56.77 v47.5,57.53
LCD_R2  (via drill 0.6)
  Top 0.254: v37.47,71.37 38.35,70.48 38.35,69.34 41.91,65.79 41.91,61.85 42.8,60.96 43.56,60.96 46.61,57.91 46.61,56.26 v46.99,55.88
  Bottom 0.254: LCD.33 36.79,39.84 41.4,44.45 43.56,44.45 45.72,46.61 | LCD_LIME2.7 37.47,60.2 37.72,59.94 39.24,59.94 40.01,59.18 45.34,59.18 46.61,57.91 46.61,56.26 v46.99,55.88 46.61,55.5 46.61,51.94 45.72,51.05
  Bottom 0.762: v37.47,71.37 LCD_LIME.7
  Bottom 1.016: 45.72,46.61 LCD_CON.7 45.72,51.05
LCD_R3  (via drill 0.6)
  Top 0.254: v37.47,70.1 37.47,69.47 41.4,65.53 41.4,61.59 42.55,60.45 43.31,60.45 45.72,58.04 v45.72,57.53
  Bottom 0.254: LCD.32 36.29,40.1 41.15,44.96 43.31,44.96 44.83,46.48 44.83,51.44 45.72,52.32
  Bottom 0.762: LCD_LIME2.8 LCD_LIME.8 v37.47,70.1
  Bottom 1.016: 45.72,52.32 LCD_CON.8 v45.72,57.53
LCD_R4  (via drill 0.6)
  Top 0.254: v36.2,71.12 36.2,69.98 39.88,66.29 39.88,62.36 44.45,57.78 v44.45,57.53
  Bottom 0.254: LCD.31 35.79,40.36 40.89,45.47 41.78,45.47 43.18,46.86 | LCD_LIME2.9 36.2,60.71 37.47,59.44 38.99,59.44 39.75,58.67 43.31,58.67 v44.45,57.53 44.07,57.15 44.07,51.94 43.18,51.05
  Bottom 0.762: v36.2,71.12 LCD_LIME.9
  Bottom 1.016: 43.18,46.86 LCD_CON.9 43.18,51.05
LCD_R5  (via drill 0.6)
  Top 0.254: v38.99,63.25 38.99,62.48 43.18,58.29 v43.18,57.53
  Bottom 0.254: LCD.30 35.29,40.62 40.64,45.97 41.53,45.97 42.29,46.74 42.29,51.44 43.18,52.32 | LCD_LIME2.10 36.2,64.64 36.83,64.01 38.23,64.01 v38.99,63.25
  Bottom 0.762: LCD_LIME2.10 LCD_LIME.10
  Bottom 1.016: 43.18,52.32 LCD_CON.10 v43.18,57.53
LCD_R6  (via drill 0.6)
  Top 0.254: v34.92,71.12 34.92,70.48 38.1,67.31 38.1,61.09 v41.91,57.28
  Bottom 0.254: LCD.29 34.79,40.89 40.64,46.74 40.64,46.86 | LCD_LIME2.11 34.92,60.58 35.56,59.94 36.2,59.94 37.21,58.93 38.73,58.93 39.5,58.17 41.02,58.17 v41.91,57.28 41.53,56.9 41.53,51.94 40.64,51.05
  Bottom 0.762: v34.92,71.12 LCD_LIME.11
  Bottom 1.016: 40.64,46.86 LCD_CON.11 40.64,51.05
LCD_R7  (via drill 0.6)
  Top 0.254: v37.21,63.12 37.21,61.21 40.64,57.78 v40.64,57.28
  Bottom 0.254: LCD.28 34.29,41.15 39.75,46.61 39.75,51.44 40.64,52.32 | LCD_LIME2.12 34.92,64.64 35.56,64.01 36.07,64.01 36.96,63.12 v37.21,63.12
  Bottom 0.762: LCD_LIME2.12 LCD_LIME.12
  Bottom 1.016: 40.64,52.32 LCD_CON.12 v40.64,57.28
LCD_U/D  (via drill 0.6)
  Top 0.254: v22.35,33.66 41.78,33.66 v42.55,34.42
  Bottom 0.254: v42.55,34.42 41.27,34.42 40.29,33.43 LCD.40 | v22.35,33.66 19.56,33.66 19.43,33.78 19.43,38.35 16.26,41.53 15.75,41.53 U/D.1
  Bottom 1.016: v42.55,34.42 R30.1 R24.2
LCD_VSYNC  (via drill 0.6)
  Top 0.254: v23.62,67.06 23.62,66.55 20.07,62.99 20.07,62.1 17.78,59.82 v17.78,57.53
  Top 1.016: v24.89,36.07 v21.46,36.07
  Bottom 0.254: LCD.10 25.29,35.67 v24.89,36.07 24.51,36.45 24.51,38.23 16.89,45.85 16.89,51.44 17.78,52.32
  Bottom 0.762: 23.5,67.06 LCD_LIME2.30 | 23.5,67.06 LCD_LIME.30 | v23.62,67.06 23.5,67.06
  Bottom 1.016: 17.78,52.32 LCD_CON.30 v17.78,57.53 | v21.46,36.07 R4.2
N$1
  Bottom 0.254: LCD.8 24.29,28.41 21.46,31.24
  Bottom 1.016: 21.46,31.24 R7.2 R6.2
N$2
  Bottom 1.016: D4.3 49.15,34.12 C14.2
N$3  (via drill 0.6)
  Top 0.254: v12.83,44.83 11.94,43.94 11.94,43.05 13.84,41.15 47.62,41.15 48.9,42.42 48.9,44.32 v49.15,44.58
  Top 1.016: v40.01,71.37 40.51,71.88 42.8,71.88 46.1,68.58 46.1,63.88 v49.15,60.83 50.8,59.18 50.8,56.13 49.66,54.99 v49.66,50.55 49.66,45.09 v49.15,44.58
  Bottom 0.508: LCD_LIME2.3 40.01,60.33 40.51,59.82 48.13,59.82 v49.15,60.83 | v12.83,44.83 11.81,44.83 CTRL/EN.1
  Bottom 0.762: v40.01,71.37 LCD_LIME.3
  Bottom 1.016: R2.2 C22.1 46.8,43.11 FET2.2 47.92,43.35 v49.15,44.58 | LCD_CON.3 50.8,49.91 50.16,50.55 v49.66,50.55
N$4
  Bottom 1.016: D4.2 48.77,31.35 C11.1 R11.2
N$5
  Bottom 0.508: U1.3 5.46,36.89 5.46,37.21
  Bottom 1.016: R9.1 R8.1 5.46,37.21
N$6
  Bottom 1.016: D3.1 56.13,31.35 C10.1 R10.2
N$7  (via drill 0.6)
  Top 1.016: v56.26,55.24 56.26,59.82 51.05,65.02 51.05,66.67 48.9,68.83 48.9,70.36 46.99,72.26 46.1,73.15 v44.96,73.15 | v53.59,43.05 v53.59,51.82
  Bottom 0.762: v44.96,73.15 5V_JACK/5V_LCD_CON.2
  Bottom 1.016: 53.59,41.91 C21.1 R1.2 | 53.59,41.91 54.97,41.91 FET1.2 | v53.59,51.82 56.64,51.82 57.4,52.58 57.4,54.1 v56.26,55.24 | 53.59,41.91 v53.59,43.05
N$8
  Bottom 1.016: 48.13,40.77 C22.2 R2.1 | 48.13,40.77 48.13,39.26 D1.1 | 48.13,40.77 48.13,41 FET2.1
N$9
  Bottom 1.016: FET1.1 54.97,40.13 C21.2 R1.1 50.9,40.13 D1.2
N$10
  Bottom 1.016: D3.3 55.24,33.97 52.9,33.97 C13.1
N$11
  Bottom 1.016: R32.1 55.2,38.61 T1.3
N$12
  Bottom 1.016: C6.1 R9.2 R14.2
N$13
  Bottom 0.508: 4.95,34.67 4.95,34.99 U1.1
  Bottom 1.016: 4.95,31.5 4.95,34.67 | D2.A 4.95,27.97 4.95,31.5 | 4.95,31.5 L1.2
N$14
  Bottom 1.016: Z3.1 3.38,44.96 R15.2 R13.1 R14.1
N$15  (via drill 0.6)
  Top 0.254: v20.95,71.37 21.59,70.74 21.59,69.72 20.83,68.96 20.83,66.04 18.54,63.75 18.54,62.87 13.97,58.29 v13.97,57.53
  Bottom 0.254: 12.7,51.05 13.59,51.94 13.59,57.15 v13.97,57.53 15.37,58.93 18.29,58.93 18.8,59.44 19.3,59.44 19.81,59.94 20.32,59.94 20.95,60.58 LCD_LIME2.33 | LCD_CON.33 12.7,46.99 14.86,44.83 14.86,43.69 L/R.2
  Bottom 0.762: v20.95,71.37 LCD_LIME.33
  Bottom 1.016: LCD_CON.33 12.7,51.05
N$16  (via drill 0.6)
  Top 0.254: v12.83,43.56 19.05,43.56 19.94,42.67 41.15,42.67 41.91,43.43 46.1,43.43 v48.13,45.47 | v56.64,34.16 57.78,35.31 57.78,43.69 v57.4,44.07
  Bottom 0.254: v57.4,44.07 56.9,44.07 55.5,45.47 v48.13,45.47
  Bottom 0.508: CTRL/EN.2 v12.83,43.56 | T1.1 56.64,35.03 v56.64,34.16
N$17  (via drill 0.6)
  Top 0.254: v12.7,57.53 12.7,59.31 17.4,64.01 18.03,64.01 20.32,66.29 20.32,69.72 v20.7,70.1
  Bottom 0.254: LCD_LIME.34 20.95,69.85 v20.7,70.1 | U/D.2 14.35,42.42 14.35,44.58 13.08,45.85 12.19,45.85 11.81,46.23 11.81,51.44 12.7,52.32
  Bottom 0.762: LCD_LIME.34 20.95,67.69 20.7,67.44 20.7,66.42 20.95,66.17 LCD_LIME2.34
  Bottom 1.016: v12.7,57.53 LCD_CON.34 12.7,52.32
N$18
  Bottom 0.762: 5V/3.3V.1 53.59,44.58
  Bottom 1.016: FET1.3 57.23,42.33 54.99,44.58 53.59,44.58
N$19
  Bottom 1.016: D1.3 49.19,36.83 R32.2
N$22  (via drill 0.6)
  Top 1.016: v5.08,76.2 45.72,76.2 v47.24,74.68
  Bottom 0.762: 46.35,74.68 5V_JACK/5V_LCD_CON.1
  Bottom 1.016: PWR_JACK.1 5.08,69.47 v5.08,76.2 | v47.24,74.68 46.35,74.68
N$23  (via drill 0.6)
  Top 1.016: v49.53,57.53 49.53,58.55 v47.24,60.83 44.83,63.25 44.83,68.07 v42.29,70.61
  Bottom 0.762: LCD_LIME2.1 41.27,60.83 v47.24,60.83 | 41.4,72.64 LCD_LIME.1 | 43.69,74.68 5V_JACK/5V_LCD_CON.3
  Bottom 1.016: LCD_CON.1 53.34,50.04 51.56,51.82 50.04,51.82 49.53,52.32 v49.53,57.53 | v42.29,70.61 41.4,71.5 41.4,72.64 41.4,73.53 42.55,74.68 43.69,74.68
N$42
  Bottom 0.254: LCD.47 43.79,23.39 R20.2
  Bottom 1.016: R20.2 R19.2
N$123  (via drill 0.6)
  Top 1.016: v53.59,35.31 53.59,41.15 54.86,42.42 v54.86,54.48
  Bottom 0.508: 51.18,64.64 51.18,65.06 U2.1
  Bottom 1.016: 48.51,63.12 D5.A | C14.1 C13.2 v53.59,35.31 | v54.86,54.48 54.86,57.15 52.12,59.89 L2.2
  Bottom 1.27: L2.2 51.94,61.72 51.94,63.12 51.18,63.12 | 51.18,63.12 51.18,64.64 | 51.18,63.12 48.51,63.12
N$126  (via drill 0.6)
  Top 1.016: v51.2,68.33 51.7,68.83 v53.85,68.83
  Bottom 0.508: U2.3 51.2,66.99 51.2,67.31
  Bottom 1.016: 51.2,67.31 v51.2,68.33 | v53.85,68.83 R26.1 R18.1
RESET
  Bottom 0.254: C20.1 43.56,31.11 42.29,29.84 LCD.44
  Bottom 1.016: C20.1 R23.2
TPX1  (via drill 0.6)
  Top 0.254: v3.81,48.51 4.83,48.51 v7.62,51.31 7.62,57.28 9.14,58.8 v9.14,59.31 9.65,59.31 15.11,64.77 15.11,69.85 16.26,70.99 v16.64,70.99
  Bottom 0.254: v3.81,48.51 3.17,48.51 1.02,46.35 1.02,22.23 3.17,20.07 R27.2 | v16.64,70.99 17.02,71.37 17.78,71.37 18.41,72.01 LCD_LIME.37 | LCD_LIME2.37 18.41,60.58 17.78,59.94 9.78,59.94 v9.14,59.31
  Bottom 0.508: LCD.51 4.83,9.53 R27.2
  Bottom 1.016: v7.62,51.31 LCD_CON.37
TPX2  (via drill 0.6)
  Top 0.254: v16,69.47 15.62,69.09 15.62,64.52 8.13,57.02 8.13,53.34 v8.76,52.7
  Top 1.016: v7.62,20.57 6.22,21.97 v3.3,21.97
  Bottom 0.254: 7.62,52.58 6.73,51.69 6.73,46.86 5.84,45.97 2.16,45.97 2.03,45.85 2.03,23.24 v3.3,21.97 | LCD_LIME.38 18.41,69.22 17.78,69.85 16.38,69.85 v16,69.47
  Bottom 0.508: LCD.53 7.24,9.78 7.24,18.94 7.62,19.32 v7.62,20.57
  Bottom 0.762: LCD_LIME.38 LCD_LIME2.38
  Bottom 1.016: 7.62,52.58 7.62,52.7 | 7.62,52.7 LCD_CON.38 | 7.62,52.7 v8.76,52.7
TPY1  (via drill 0.6)
  Top 0.254: v6.35,56.26 6.35,56.77 8.26,58.67 8.26,59.69 8.76,60.2 9.78,60.2 14.61,65.02 14.61,70.87 v15.49,71.75
  Bottom 0.254: R28.2 6.35,20.19 5.59,20.95 3.05,20.95 1.52,22.48 1.52,46.1 1.91,46.48 4.57,46.48 5.08,46.99 LCD_CON.39 | v15.49,71.75 15.88,72.14 | LCD_LIME2.39 17.14,60.45 9.02,60.45 8.26,59.69 8.26,58.67 6.35,56.77 v6.35,56.26 5.97,55.88 5.97,51.94 5.08,51.05
  Bottom 0.508: LCD.52 6.35,9.27 R28.2
  Bottom 0.762: 15.88,72.14 17.14,72.14 LCD_LIME.39
  Bottom 1.016: LCD_CON.39 5.08,51.05
TPY2  (via drill 0.6)
  Top 1.016: v8.26,18.3 v3.81,18.3
  Bottom 0.254: 5.08,52.32 4.19,51.44 4.19,50.29 0.51,46.61 0.51,21.97 3.81,18.67 v3.81,18.3 | LCD_LIME2.40 17.14,63.88 14.22,60.96 8.76,60.96 7.75,59.94 7.75,58.93 5.08,56.26 LCD_CON.40
  Bottom 0.508: LCD.54 8.26,10.03 v8.26,18.3
  Bottom 0.762: LCD_LIME2.40 LCD_LIME.40
  Bottom 1.016: 5.08,52.32 LCD_CON.40
VCC  (via drill 0.6, 0.6 pad 1.02)
  Top 1.016: 48.01,40.26 49.78,42.04 v49.78,43.31 | 48.01,40.26 48.01,37.72 v47.75,37.47 | v8.38,43.43 11.56,40.26 v15.88,40.26 48.01,40.26 | 15.88,29.72 v15.88,21.84 28.32,9.4 PWR.5 | 15.88,29.72 v15.88,32.77 | 15.88,29.72 v21.46,29.72
  Bottom 0.254: R19.1 45.34,25.02 44.58,25.78 44.58,31.88 45.34,32.64 R23.1 | 21.46,27.94 23.79,25.61 LCD.7
  Bottom 0.508: v47.75,37.47 47.75,33.91 46.48,32.64 R23.1
  Bottom 0.762: 51.05,44.58 5V/3.3V.3
  Bottom 1.016: R24.1 R25.1 v47.75,37.47 | 21.46,27.94 C1.1 C2.1 v21.46,29.72 | 15.88,36.07 15.88,37.59 | 15.88,37.59 R5.1 | 15.88,37.59 v15.88,40.26 | v8.38,43.43 R13.2 | R6.1 v15.88,32.77 15.88,36.07 | 15.88,36.07 R4.1 | v15.88,21.84 R28.1 R27.1 | FET2.3 49.78,42.16 v49.78,43.31 51.05,44.58
VCOM  (via drill 0.6)
  Top 1.016: v23.37,19.68 v43.31,19.68 51.05,11.94 PWR.4
  Bottom 0.254: C19.1 43.56,26.54 42.8,25.78 42.8,22.75 43.29,22.26 LCD.46 43.29,19.7 v43.31,19.68 | v23.37,19.68 23.29,19.76 LCD.6 23.29,23.83 22.99,24.13
  Bottom 0.762: Z4.1 21.34,25.78 22.99,24.13
  Bottom 1.016: R22.2 R29.1 C19.1
VLED+  (via drill 0.6)
  Top 1.016: v6.48,27.18 v6.48,35.94
  Bottom 0.254: 20.79,22.79 LCD.1 | LCD.2 21.29,22.29 21.16,22.42
  Bottom 0.508: v6.48,35.94 U1.5 | 6.48,24.13 7.75,22.86 20.72,22.86 20.79,22.79 21.16,22.42
  Bottom 1.016: C5.1 C4.1 10.79,27.18 | 10.79,27.18 D2.K v6.48,27.18 6.48,24.13 | 10.79,27.18 C3.1
VLED-  (via drill 0.6)
  Top 1.016: v8.51,23.88 v8.51,38.61
  Bottom 0.254: 21.79,23.31 LCD.3 | LCD.4 22.29,22.81 22.15,22.95
  Bottom 0.508: 22.15,22.95 21.79,23.31 21.48,23.62 8.76,23.62 v8.51,23.88
  Bottom 1.016: R8.2 v8.51,38.61 R12.1

## Text on the board
tNames: Da se iztrie beliq pe4at na LCD-to v TopSilk!
bNames: 5VDC only!!! | 1 | LCD-OLINUXINO-7''TS | Rev.A | WWW.OLIMEX.COM | (C) 2014 | +16V | +10.4V | (5V/3.3V) | DCDC_VCC | +3.8V | +3.3V | -6.8V | GND | GND